# Altium PCB Teensy PCB.PcbDoc
Units mm, origin at the board's own origin, x right, y up, seen from the top; angles counter-clockwise.
Board outline 36 x 75 mm, 2 copper layers (Component Side, Solder Side); 17 components, 12 nets, 93 pads, 7 vias.
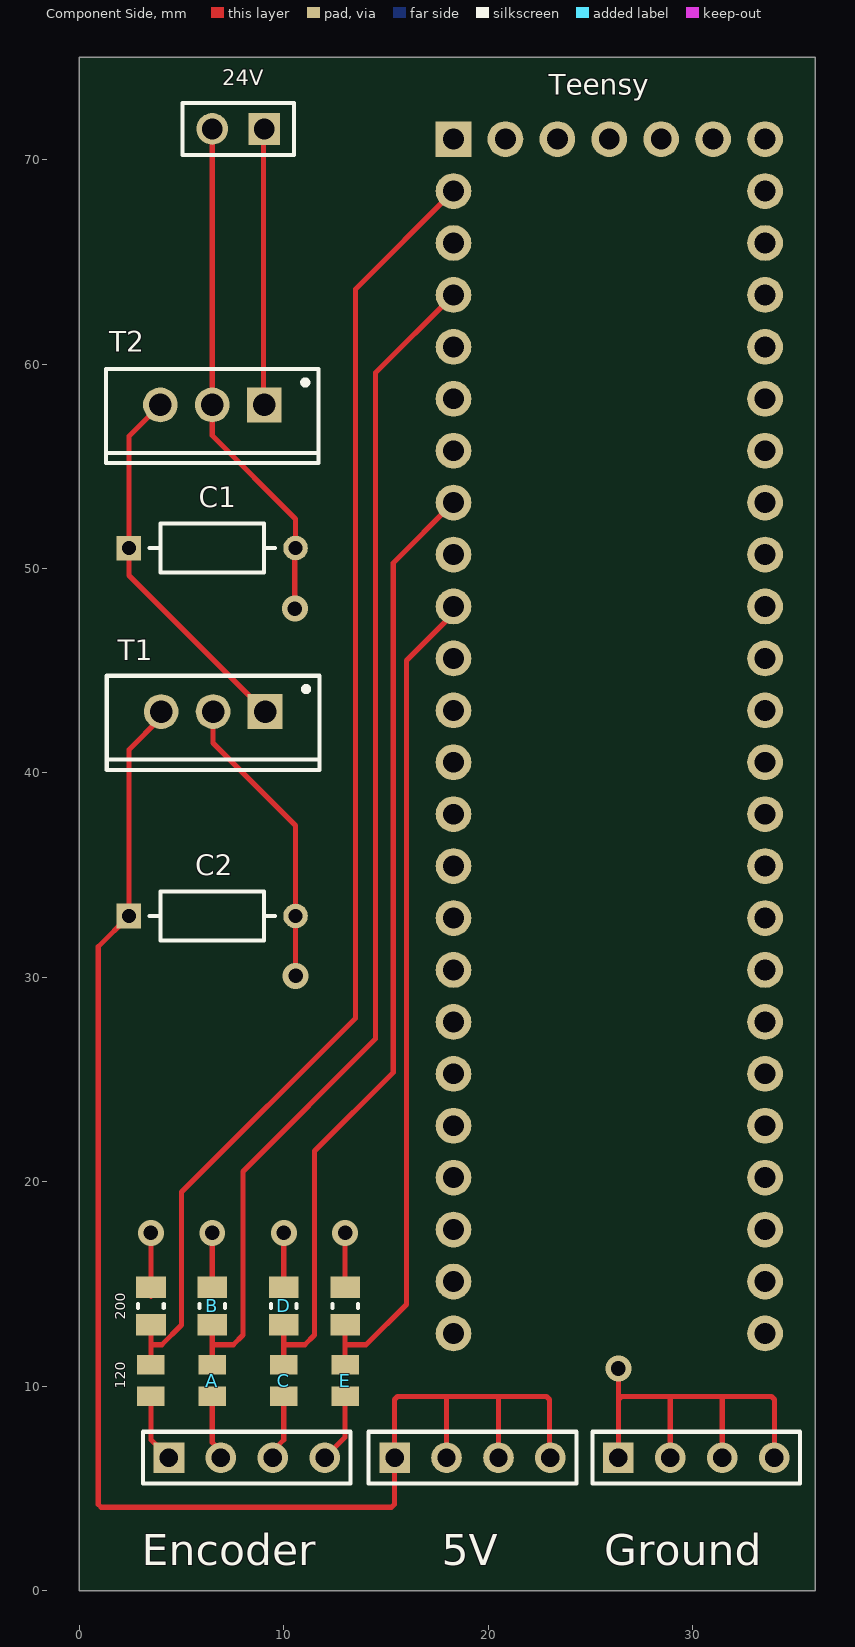
[diagram p0: Component Side view]
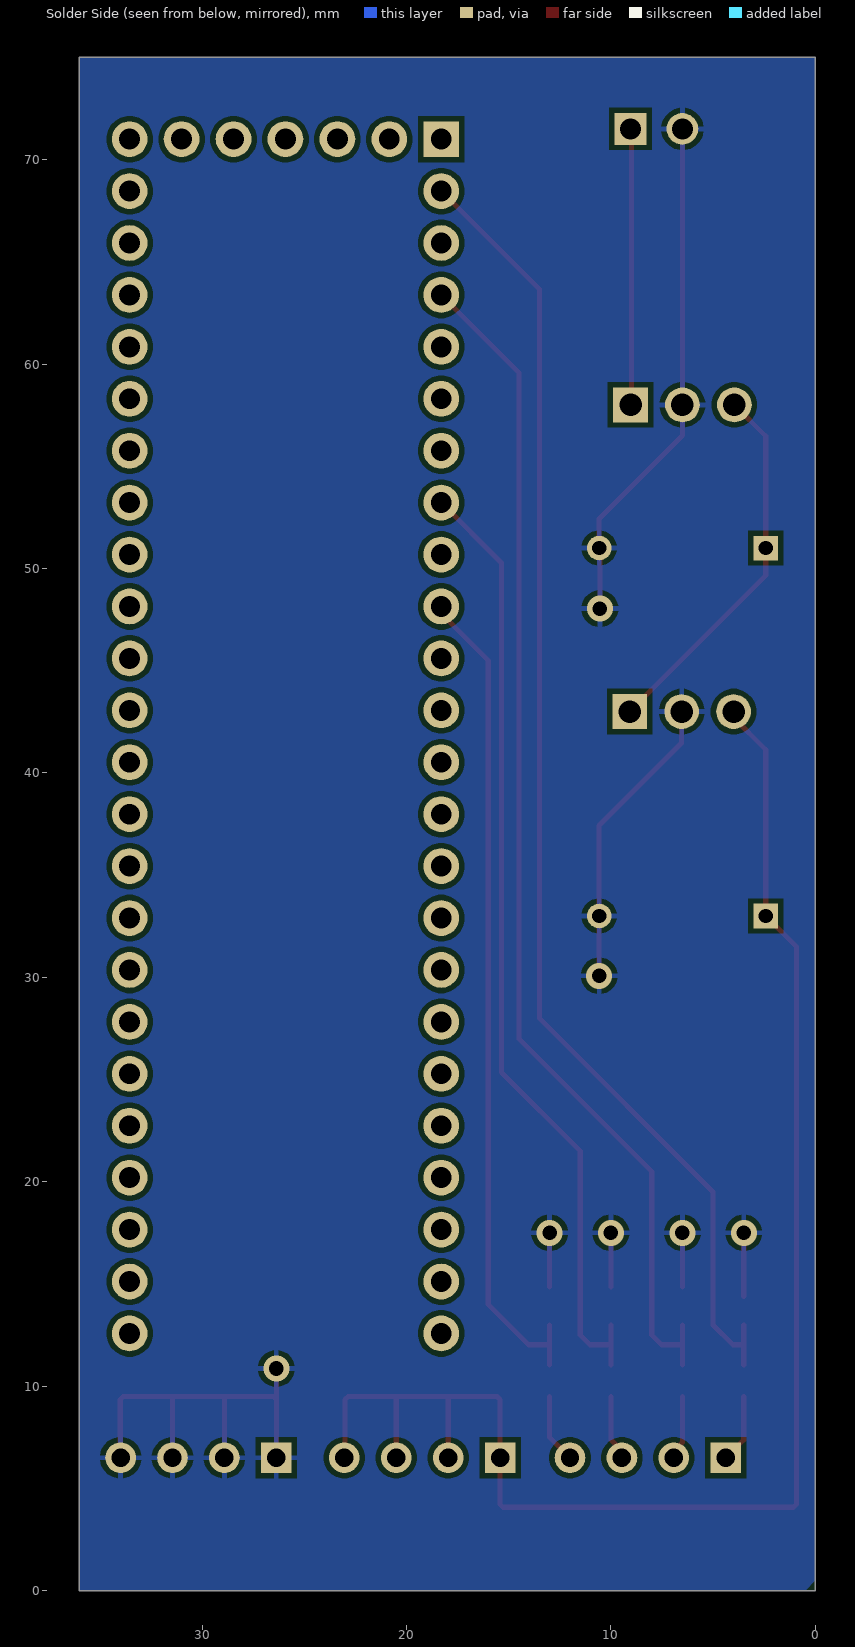
[diagram p1: Solder Side view, seen from below]

## Layer stack, top to bottom
Top Solder: solder mask 0.0102, Solder Resist, Dk 3.5
Component Side: signal copper 0.035
Dielectric 1: dielectric 0.32, FR-4, Dk 4.8
Solder Side: signal copper 0.035
Bottom Solder: solder mask 0.0102, Solder Resist, Dk 3.5

## Board outline
0,0 36,0 36,75 0,75

## Design rules (kind name [scope] priority, off if disabled: settings)
Clearance [All] p1: gap=0.254 ignorepadtopadclearanceinfootprint=FALSE except(0: Arc-Hole Track-Hole SMDPad-Hole THPad-Hole Via-Hole Fill-Hole Poly-Hole Region-Hole Text-Hole; 0.1: Arc-SMDPad Track-SMDPad SMDPad-SMDPad)
MinimumSolderMaskSliver [All] p1: minsoldermaskwidth=0.1
PolygonConnect [All] p1: connectstyle=Relief reliefconductorwidth=0.254 reliefentries=4 polygonreliefangle="90 Angle" airgapwidth=0.254
RoutingVias [All] p1: holewidth=0.711 width=1.27 viastyle="Through Hole" minholewidth=0.711 minwidth=1.27 maxholewidth=0.711 maxwidth=1.27
SilkToSolderMaskClearance [IsPad] p1: minsilkscreentomaskgap=0.1 clearancetoexposedcopper=TRUE
SolderMaskExpansion [All] p1: expansion=0.102 istentingtop=FALSE
Width [All] p1: maxlimit=0.254 minlimit=0.254 preferedwidth=0.254
28 further rules are at their usual default settings.

## Classes and differential pairs
component class "Teensy PCB Schematic": 5V 24V 120 200 C1 C2 Encoder Ground T1 T2 Teensy

## Components (designator, comment, footprint, x,y, rotation, side; value= is the part's Value field where it differs from the comment)
5V "Header 4" HDR1X4 15.42,6.5 r0 top
24V "TSW-102-26-F-S" SMTC-TSW-102-26-XX-S 9.04,71.5 r180 top
120 "ERJ-6GEYJ121V" RESC2013X70X40LL20T20 3.5,10.275 r270 top
200 "CRCW0805200RFKEA" RESC2013X50X30NL20T20 3.5,13.925 r270 top
A "ERJ-6GEYJ121V" RESC2013X70X40LL20T20 6.5,10.275 r270 top
B "CRCW0805200RFKEA" RESC2013X50X30NL20T20 6.5,13.925 r270 top
C "ERJ-6GEYJ121V" RESC2013X70X40LL20T20 10,10.275 r270 top
C1 "C410C104M5U5TA7200" FP-C410C104M5U5TA7200-MFG 6.5,51 r0 top
C2 "C410C104M5U5TA7200" FP-C410C104M5U5TA7200-MFG 6.5,33 r0 top
D "CRCW0805200RFKEA" RESC2013X50X30NL20T20 10,13.925 r270 top
E "ERJ-6GEYJ121V" RESC2013X70X40LL20T20 13,10.275 r270 top
Encoder "Header 4" HDR1X4 4.38,6.5 r0 top
F "CRCW0805200RFKEA" RESC2013X50X30NL20T20 13,13.925 r270 top
Ground "Header 4" HDR1X4 26.365,6.5 r0 top
T1 "L7805CV" TO220 6.54,43 r180 top
T2 "L7812CV" TO220 6.5,58 r180 top
Teensy "24x7 header pins" "New footprint 1" 18.3,71 r0 top

## Footprints (in the part's own frame and the unit in brackets; to place one, negate y for a bottom-side part, rotate by r counter-clockwise, add the part's x,y. Pads: shape width x height; smd on the part's side, far side on the other; paste and mask are expansions set on the pad)
FP-C410C104M5U5TA7200-MFG [mm]
  rect 1.2x1.2 hole 0.7 paste-1000 mask+0: 1(-4.075,0)
  round 1.2 hole 0.7 paste-1000 mask+0: 2(4.075,0)
  silkscreen extent -3.08,-1.2 3.08,1.2, body extent -4.77,-1.31 4.77,1.31, height 0.25
HDR1X4 [mm] "Connector; Header; 4 Position"
  rect 1.5x1.5 hole 0.9: 1(0,0)
  round 1.5 hole 0.9: 2(2.54,0) 3(5.08,0) 4(7.62,0)
  silkscreen extent -1.27,-1.27 8.89,1.27
"New footprint 1" [mm]
  rect 1.75x1.75 hole 1.02: 1(0,0)
  round 1.75 hole 1.02: 2(0,-2.54) 3(0,-5.08) 4(0,-7.62) 5(0,-10.16) 6(0,-12.7) 7(0,-15.24) 8(0,-17.78) 9(0,-20.32) 10(0,-22.86) 11(0,-25.4) A1(2.54,0) A2(5.08,0) A3(7.62,0) A4(10.16,0) A5(12.7,0) A6(15.24,0) B11(0,-27.94) B12(0,-30.48) B13(0,-33.02) B14(0,-35.56) B15(0,-38.1) B16(0,-40.64) B17(0,-43.18) B18(0,-45.72) B19(0,-48.26) B20(0,-50.8) B21(0,-53.34) B22(0,-55.88) B23(0,-58.42) C1(15.24,-2.54) C2(15.24,-5.08) C3(15.24,-7.62) C4(15.24,-10.16) C5(15.24,-12.7) C6(15.24,-15.24) C7(15.24,-17.78) C8(15.24,-20.32) C9(15.24,-22.86) C10(15.24,-25.4) C11(15.24,-27.94) C12(15.24,-30.48) C13(15.24,-33.02) C14(15.24,-35.56) C15(15.24,-38.1) C16(15.24,-40.64) C17(15.24,-43.18) C18(15.24,-45.72) C19(15.24,-48.26) C20(15.24,-50.8) C21(15.24,-53.34) C22(15.24,-55.88) C23(15.24,-58.42)
RESC2013X50X30NL20T20 [mm] "Chip Resistor, 2-Leads, Body 2.00x1.25mm, IPC Medium Density"
  rect 1.05x1.45 smd: 1(-0.925,0) 2(0.925,0)
  silkscreen extent -0.1,-0.63 0.1,0.63, body extent -1.1,-0.72 1.1,0.72, height 0.5
RESC2013X70X40LL20T20 [mm] "Chip Resistor, 2-Leads, Body 2.00x1.25mm, IPC High Density"
  rect 0.95x1.35 smd: 1(-0.775,0) 2(0.775,0)
  body extent -1.1,-0.72 1.1,0.72, height 0.7
SMTC-TSW-102-26-XX-S [mm] ".025 SQ Post Terminal Strip Assembly, 1x2 Pins, Vertical, 2.54mm Pitch, Male"
  rect 1.55x1.55 hole 1.02: 1(0,0)
  round 1.55 hole 1.02: 2(2.54,0)
  silkscreen extent -1.46,-1.27 4,1.27, body extent -1.4,-1.27 3.81,1.27, height 8.38
TO220 [mm] "TO, Thru-Hole, Vertical, Heatsink Mounted; 3 In-Line Leads; Pitch 2.54 mm"
  rect 1.7x1.7 hole 1.1: 1(-2.54,0)
  round 1.7 hole 1.1: 2(0,0) 3(2.54,0)
  silkscreen extent -5.2,-1.75 5.2,2.85, body extent -5.25,-1.8 5.25,2.9, height 19.7

## Part data
5V Encoder Ground: library part CMP-002-000097-1, "Header, 4-Pin", Component Type=Standard, Design Item ID="Header 4", LatestRevisionDate=17-Jul-2002, LatestRevisionNote="Re-released for DXP Platform.", Pin Count=4, Publisher="Altium Limited", Source="Miscellaneous Connectors.SchLib"
24V: library part CMP-1024-00329-1, "0.025\" SQ Post Header, Through-hole, Vertical, -55 to 125 degC, 2.54 mm Pitch, 2-Pin, Male, RoHS", Manufacturer=Samtec, Temperature Range="-55 to 125 degC", ComponentLink1Description="Manufacturer URL", ComponentLink1URL=http://www.samtec.com, ComponentLink2Description=Datasheet, ComponentLink2URL=http://www.samtec.com/documents/webfiles/pdf/TSW_TH.PDF, ComponentLink3Description="Package Specification", ComponentLink3URL=http://www.samtec.com/documents/webfiles/cpdf/TSW-XXX-XX-XXX-X-XX-XXX-MKT.pdf, DatasheetVersion=F-214, Mounting Technology=Through-hole, Orientation=Vertical, PackageDescription=".025[0.64] SQ. Post Terminal Strip Assembly", PackageReference=TSW-102-26-XX-S, PackageVersion="DM, 8/1988", PartNumber=TSW-102-26-F-S, Pitch="2.54 mm", RoHS=True
120 A C E: library part CMP-2001-00345-1, Manufacturer=Panasonic, Part Number=ERJ-6GEYJ121V
200 B D F: library part CMP-2001-03663-1, Manufacturer="Vishay Dale", Part Number=CRCW0805200RFKEA
C1 C2: library part CMP-03020-034640-1, "CAP CER 0.1UF 50V Z5U AXIAL", Capacitance=100nF, Case/Package=Axial, Dielectric=Z5U, Max Operating Temperature=85°C, Min Operating Temperature=10°C, Package Quantity=5000, Tolerance=20%, Voltage Rating=50V, Construction=AXIAL, Dissipation Factor=4%, Lead Diameter=0.51mm, Lead Free="Lead Free", Lead Length=25.4mm, Length=4.32mm, Mount="Through Hole", Number of Pins=2, Packaging="Tape and Reel", Radiation Hardening=No, REACH SVHC="No SVHC", RoHS Compliant=Yes, Series="Aximax 400", Termination=Axial, Voltage Rating (DC)=50V
T1: library part CMP-0244-00483-1, "Positive Voltage Regulator, 5V, 3-Pin TO-220", ComponentLink1Description="Manufacturer URL", ComponentLink1URL=http://www.st.com, ComponentLink2Description=Datasheet, ComponentLink2URL=http://www.st.com/internet/com/TECHNICAL_RESOURCES/TECHNICAL_LITERATURE/DATASHEET/CD00000444.pdf, ComponentLink3Description="Package Specification", ComponentLink3URL=http://www.st.com/internet/com/TECHNICAL_RESOURCES/TECHNICAL_LITERATURE/PACKAGE_INFORMATION/CD00004649.pdf, DatasheetVersion=16/11/2011, PackageDescription="TO, Thru-Hole, Vertical, Heatsink Mounted; 3 In-Line Leads; Pitch 2.54 mm", PackageReference=TO220, PackageVersion=ver3.0
T2: library part CMP-0244-00450-1, "Positive Voltage Regulator, 12V, 3-Pin TO-220", ComponentLink1Description="Manufacturer URL", ComponentLink1URL=http://www.st.com, ComponentLink2Description=Datasheet, ComponentLink2URL=http://www.st.com/internet/com/TECHNICAL_RESOURCES/TECHNICAL_LITERATURE/DATASHEET/CD00000444.pdf, ComponentLink3Description="Package Specification", ComponentLink3URL=http://www.st.com/internet/com/TECHNICAL_RESOURCES/TECHNICAL_LITERATURE/PACKAGE_INFORMATION/CD00004649.pdf, DatasheetVersion=16/11/2011, PackageDescription="TO, Thru-Hole, Vertical, Heatsink Mounted; 3 In-Line Leads; Pitch 2.54 mm", PackageReference=TO220, PackageVersion=ver3.0
Teensy: library part CMP-00012-1, "for teensy 3.6"

## Via types
v1: diameter 1.27, hole 0.711, Component Side to Solder Side, 7 vias

## Nets (pads, with @x,y where several pads share a name; then routed paths per layer and width w, separated by ;. In a path a pad name is that pad's centre, name@x,y a point inside that pad or via, vN(x,y) a via of type N, cw(c..) or ccw(c..) an arc to the next point about the centre after c; other vN are vias at no path point)
5V: 5V.1 5V.2 5V.3 5V.4 C2.1 T1.3 | length 76.5
  Component Side w0.254: T1.3 4,42.703 2.425,41.128 C2.1 0.92,31.495 0.92,4.229 1.069,4.08 15.271,4.08 15.42,4.229 5V.1 15.42,9.351 15.569,9.5 18,9.5 ; 5V.2 17.96,9.46 18,9.5 ; 5V.3 20.5,9.426 20.426,9.5 ; 5V.4@23,6.46 5V.4 23,6.54 23,9.351 22.851,9.5 20.426,9.5 ; 18,9.5 20.426,9.5
24V: 24V.1 T2.1 | length 13.5
  Component Side w0.254: T2.1 9,58.04 9,71.46 24V.1
GND: 24V.2 200.1 B.1 C1.2 C2.2 D.1 F.1 Ground.1 Ground.2 Ground.3 Ground.4 T1.2 T2.2 | length 71.9
  Component Side w0.254: 200.1@3.5,14.4 200.1 v1(3.5,17.5) ; B.1 v1(6.5,17.5) ; 24V.2 T2.2 6.5,56.5 10.575,52.425 C1.2 10.537,50.962 v1(10.537,48.038) ; T1.2 6.54,41.46 10.575,37.425 C2.2 v1(10.575,30.075) ; D.1 v1(10,17.5) ; F.1 v1(13,17.5) ; Ground.1 26.365,9.351 ; v1(26.365,10.865) 26.365,9.351 ; Ground.2 28.905,9.398 29.007,9.5 ; Ground.3 31.445,9.445 31.5,9.5 ; Ground.4 34,6.515 34,9.351 33.851,9.5 31.5,9.5 ; 26.365,9.351 26.514,9.5 29.007,9.5 ; 29.007,9.5 31.5,9.5
Net120_1: 120.1 200.2 Teensy.2 | length 64.8
  Component Side w0.254: 120.1 3.5,12.025 ; 200.2 3.5,12.025 ; Teensy.2 13.5,63.66 13.5,28 5,19.5 5,13 4.025,12.025 3.5,12.025
Net120_2: 120.2 Encoder.1 | length 3.4
  Component Side w0.254: 120.2 3.5,7.38 Encoder.1
NetA_1: A.1 B.2 Teensy.4 | length 58.8
  Component Side w0.254: A.1 6.5,12.025 ; B.2 6.5,12.025 ; Teensy.4 14.492,59.572 14.492,26.992 8,20.5 8,12.5 7.525,12.025 6.5,12.025
NetA_2: A.2 Encoder.2 | length 3.2
  Component Side w0.254: A.2 6.5,7.257 6.92,6.837 Encoder.2
NetC1_1: C1.1 T1.1 T2.3 | length 18.4
  Component Side w0.254: T2.3 2.425,56.465 C1.1 2.425,49.655 T1.1
NetC_1: C.1 D.2 Teensy.8 | length 47.2
  Component Side w0.254: C.1 10,12.025 ; D.2 10,12.025 ; Teensy.8 15.349,50.269 15.349,25.349 11.5,21.5 11.5,12.5 11.025,12.025 10,12.025
NetC_2: C.2 Encoder.3 | length 3.2
  Component Side w0.254: Encoder.3 9.46,6.837 10,7.377 C.2
NetE_1: E.1 F.2 Teensy.10 | length 40.9
  Component Side w0.254: E.1 13,12.025 ; F.2 13,12.025 ; Teensy.10 18.3,47.8 16,45.5 16,14 14.025,12.025 13,12.025
NetE_2: E.2 Encoder.4 | length 3.4
  Component Side w0.254: Encoder.4 13,7.5 E.2
pads on no net: Teensy.1 Teensy.3 Teensy.5 Teensy.6 Teensy.7 Teensy.9 Teensy.11 Teensy.A1 Teensy.A2 Teensy.A3 Teensy.A4 Teensy.A5 Teensy.A6 Teensy.B11 Teensy.B12 Teensy.B13 Teensy.B14 Teensy.B15 Teensy.B16 Teensy.B17 Teensy.B18 Teensy.B19 Teensy.B20 Teensy.B21 Teensy.B22 Teensy.B23 Teensy.C1 Teensy.C2 Teensy.C3 Teensy.C4 Teensy.C5 Teensy.C6 Teensy.C7 Teensy.C8 Teensy.C9 Teensy.C10 Teensy.C11 Teensy.C12 Teensy.C13 Teensy.C14 Teensy.C15 Teensy.C16 Teensy.C17 Teensy.C18 Teensy.C19 Teensy.C20 Teensy.C21 Teensy.C22 Teensy.C23

## Polygon pours and split planes (outlines as drawn)
GND on Solder Side "GND_L02_P000" (solid, pour order 0): 0,75 36,75 36,0 0.5,0 0,0.5 0,51

## Silkscreen, mask and mechanical layers (free items; w line width, h text height)
Mechanical 1:
  lines w0.01: 36,-5 36,75 27,75 9,75 0,75 0,0 36,0